# Altium PCB Wiring of the printed circuit board.pcbdoc
Units mm, origin at the board's own origin, x right, y up, seen from the top; angles counter-clockwise.
Board outline 278.37 x 179.81 mm, 2 copper layers (Top Layer, Bottom Layer); 108 components, 101 nets, 596 pads, 86 vias.
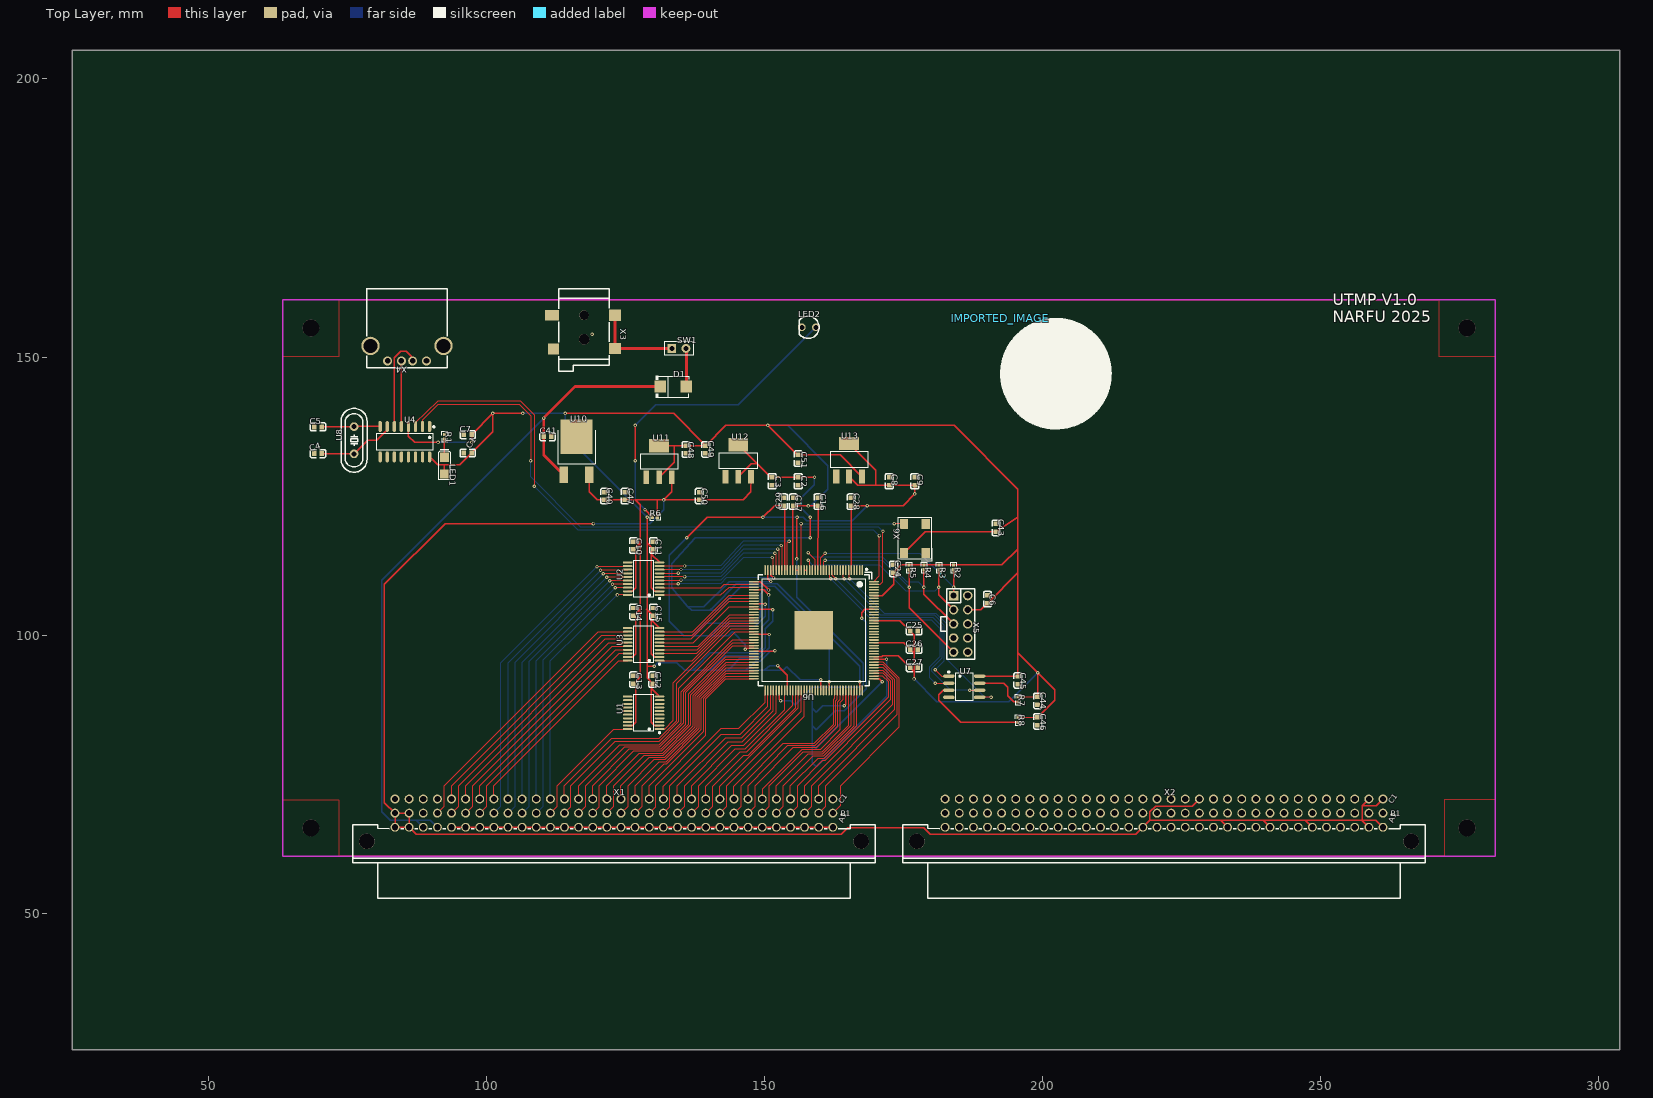
[diagram p0: Top Layer view]
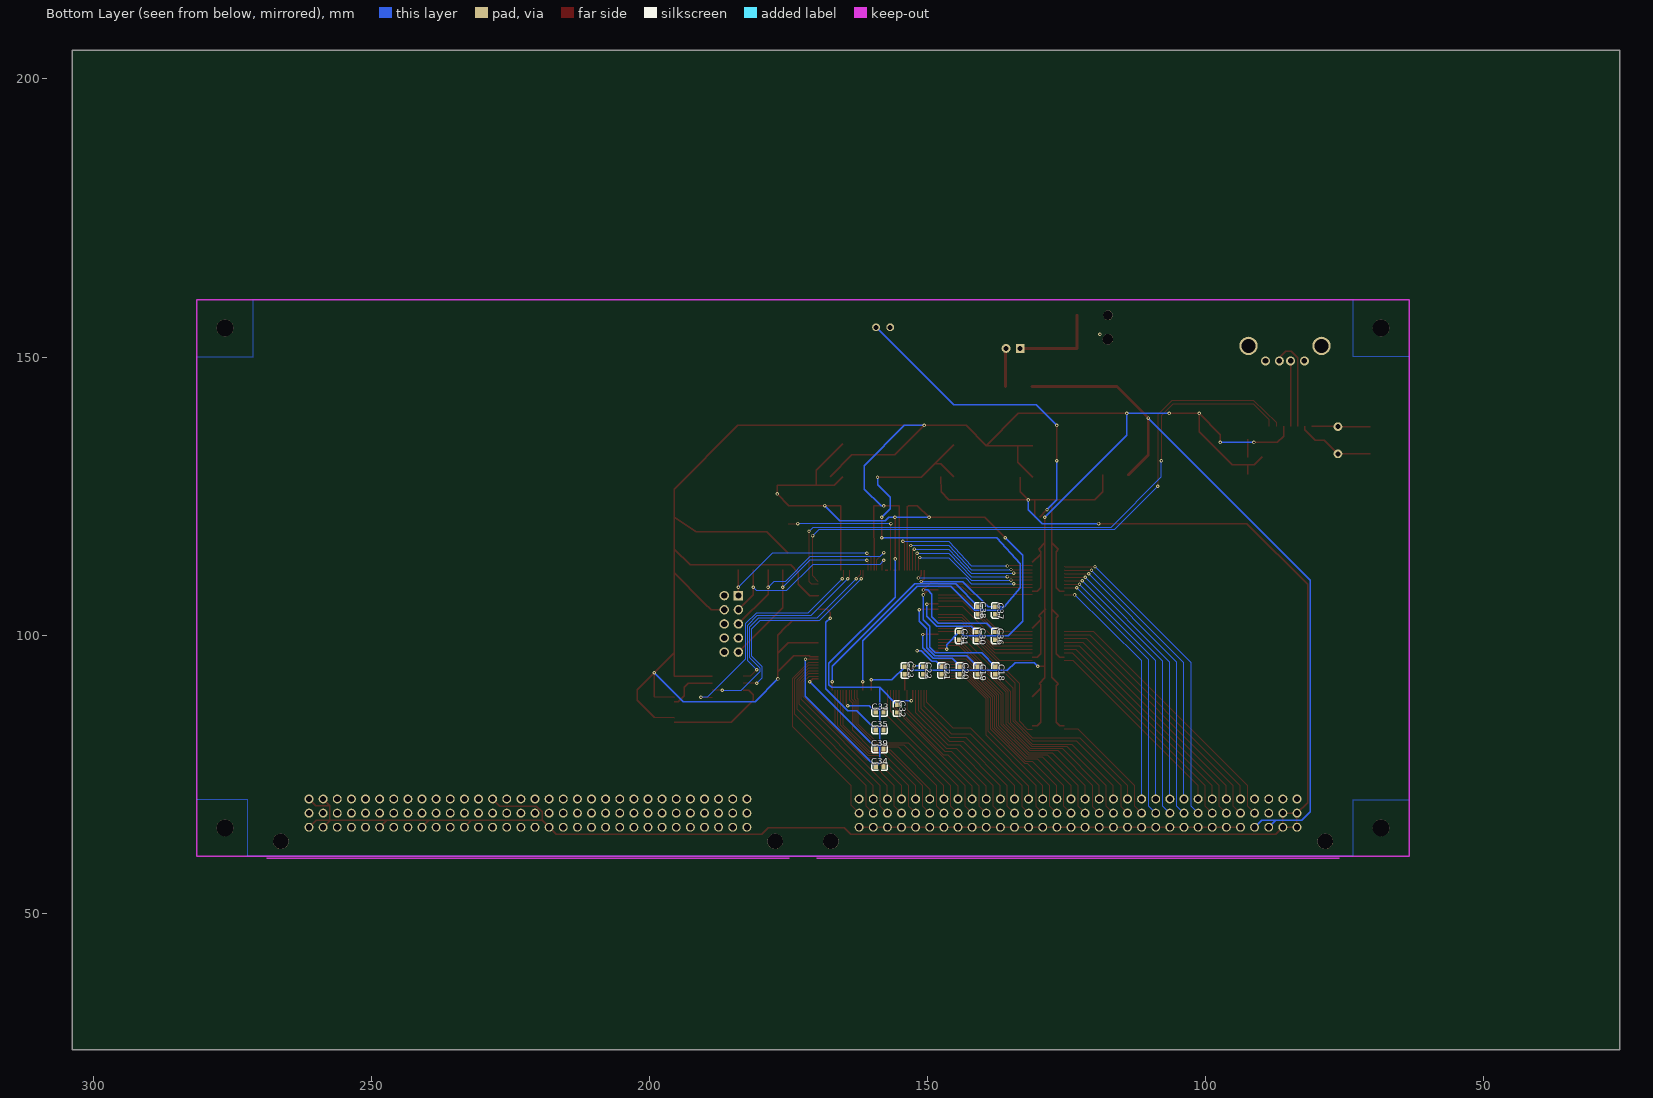
[diagram p1: Bottom Layer view, seen from below]

## Layer stack, top to bottom
Top Layer: signal copper (thickness not stored)
Dielectric: dielectric 0.32, FR-4, Dk 4.8
Bottom Layer: signal copper (thickness not stored)

## Board outline
303.775,25.4 25.4,25.4 25.4,205.207 303.775,205.207

## Components (designator, comment, footprint, x,y, rotation, side; value= is the part's Value field where it differs from the comment)
C1 "100nF" C0603#1 96.563,132.743 r0 top
C2 "10uF" C0603#1 155.999,127.663 r90 top
C3 "100nF" C0603#1 151.3,127.663 r90 top
C4 "24pF" C0603#1 69.639,132.616 r0 top
C5 "24pF" C0603#1 69.639,137.442 r0 top
C6 "100nF" C0603#1 190.035,106.454 r270 top
C7 "100nF" C0603#1 96.563,136.045 r180 top
C8 "100nF" C0603#1 172.382,127.663 r270 top
C9 "10uF" C0603#1 176.954,127.663 r270 top
C10 "100nF" C0603#1 126.408,116.106 r90 top
C11 "100nF" C0603#1 129.964,116.106 r90 top
C12 "100nF" C0603#1 129.837,91.976 r90 top
C13 "100nF" C0603#1 126.408,91.976 r90 top
C14 "100nF" C0603#1 126.408,104.168 r90 top
C15 "100nF" C0603#1 129.964,104.168 r90 top
C16 "100nF" C0603#1 159.555,123.98 r90 top
C17 "100nF" C0603#1 155.11,123.98 r90 top
C18 "100nF" C0603#2 137.711,93.627 r90 bottom
C19 "100nF" C0603#2 140.886,93.627 r90 bottom
C20 "100nF" C0603#2 144.061,93.627 r90 bottom
C21 "100nF" C0603#2 147.363,93.627 r90 bottom
C22 "100nF" C0603#2 150.665,93.627 r270 bottom
C23 "100nF" C0603#2 153.967,93.627 r270 bottom
C24 "100nF" C0603#1 173.144,111.915 r270 top
C25 "100nF" C0603#1 176.827,100.739 r180 top
C26 "100nF" C0603#1 176.827,97.437 r180 top
C27 "100nF" C0603#1 176.827,94.135 r180 top
C28 "100nF" C0603#1 165.524,123.98 r90 top
C29 "100nF" C0603#1 153.332,123.98 r90 top
C30 "100nF" C0603#2 141.013,99.85 r90 bottom
C31 "100nF" C0603#2 144.188,99.85 r90 bottom
C32 "100nF" C0603#2 155.364,86.769 r90 bottom
C33 "100nF" C0603#2 158.539,86.134 r0 bottom
C34 "100nF" C0603#2 158.539,76.355 r0 bottom
C35 "100nF" C0603#2 158.539,82.959 r0 bottom
C36 "100nF" C0603#2 137.711,99.85 r270 bottom
C37 "100nF" C0603#2 137.711,104.422 r90 bottom
C38 "100nF" C0603#2 140.759,104.422 r270 bottom
C39 "100nF" C0603#2 158.539,79.53 r0 bottom
C40 "100nF" C0603#1 121.201,124.996 r270 top
C41 "100nF" C0603#1 110.914,135.664 r180 top
C43 "100nF" C0603#1 191.559,119.281 r270 top
C44 "100nF" C0603#1 199.052,88.166 r270 top
C45 "100nF" C0603#1 195.496,91.849 r270 top
C46 "100nF" C0603#1 199.052,84.483 r270 top
C47 "100nF" C0603#1 124.884,124.996 r270 top
C48 "100nF" C0603#1 135.806,133.378 r90 top
C49 "10uF" C0603#1 139.362,133.378 r90 top
C50 "100nF" C0603#1 138.219,124.996 r270 top
C51 "100nF" C0603#1 155.999,131.727 r90 top
D1 "P6SMB12A" SMB_L4.6-W3.6-LS5.3-RD 133.52,144.681 r0 top
IMPORTED_IMAGE "IMPORTED_IMAGE" IMPORTED_IMAGE 192.347,157.005 r0 top
LED1 "C150KRKT" LED1206-RD 92.372,130.457 r270 top
LED2 "LED-TH-3mm_R" LED-TH_BD3.0_RED 157.904,155.349 r270 top
R1 "1.5КОм" R0402 92.372,135.664 r270 top
R2 "4.7КОм" R0402 183.939,112.169 r270 top
R3 "4.7КОм" R0402 181.272,112.169 r270 top
R4 "4.7КОм" R0402 178.605,112.169 r270 top
R5 "4.7КОм" R0402 175.938,112.169 r270 top
R6 "1.5КОм" R0402 130.218,121.186 r180 top
R7 "4.7КОм" R0402 195.496,88.42 r270 top
R8 "4.7КОм" R0402 195.496,84.737 r270 top
SW1 "Разрыв для кнопки" HDR-F-2.54_1X2 134.536,151.539 r0 top
U1 "YF08E" TSSOP-20_L6.5-W4.4-P0.65-LS6.4-BL 128.186,86.007 r90 top
U2 "YF08E" TSSOP-20_L6.5-W4.4-P0.65-LS6.4-BL 128.186,110.137 r90 top
U3 "YF08E" TSSOP-20_L6.5-W4.4-P0.65-LS6.4-BL 128.186,98.326 r90 top
U4 "CH340G" SOIC-16_L9.9-W3.9-P1.27-LS6.0-BL 85.26,134.775 r180 top
U6 "EP4CE6E22C8N" PQFP-144_L20.0-W20.0-P0.50-LS22.0-BL-EP 158.793,100.866 r180 top
U7 "M25P16-VMN6TP" SOIC-8_L4.9-W3.9-P1.27-LS6.0-BL 185.844,90.706 r270 top
U8 "12MHz" HC-49S_L11.5-W4.7-P4.88 76.116,135.029 r90 top
U10 "78M05D" TO-252-2_L6.6-W6.1-P4.57-LS9.9-BR-CW 116.121,132.235 r270 top
U11 "SPX1117M3" SOT-223-4_L6.5-W3.5-P2.30-LS7.0-BR 130.98,131.219 r270 top
U12 "SPX1117M3" SOT-223_L6.5-W3.5-P2.30-LS7.0-BR 145.204,131.346 r270 top
U13 "SPX1117M3" SOT-223-3_L6.5-W3.4-P2.30-LS7.0-BR 165.143,131.473 r270 top
X1 "DIN 41612" CONN-TH_WINGTAT_9001-14961C00A 122.852,67.973 r0 top
X2 "DIN 41612" CONN-TH_WINGTAT_9001-14961C00A 221.785,67.973 r0 top
X3 "DC" DC-IN_DC050-T 117.391,154.46 r270 top
X4 "USB-231-ARY" USB-A-TH_USB-231-ARY 85.641,150.65 r180 top
X5 "JTAG PLS14" HDR-TH_10P-P2.54-V-M-R2-C5-S2.54 185.209,102.009 r270 top
X6 "50MHz" OSC-SMD_4P-L7.0-W5.0-BL 176.954,117.376 r90 top
? "" ? 73.386,57.587 r0 top
? "" ? 172.319,56.505 r0 top
? "" ? 271.252,56.091 r0 top
? "" ? 65.829,54.539 r0 top
? "" ? 278.808,51.728 r0 top
? "" ? 62.094,62.765 r0 top
? "" ? 172.255,175.288 r0 top
? "" ? 50.72,110.264 r0 top
? "" ? 59.808,157.762 r0 top
? "" ? 65.829,162.783 r0 top
? "" ? 278.808,162.149 r0 top
? "" ? 283.464,157.761 r0 top
? "" ? 73.386,169.114 r0 top
? "" ? 102.913,169.047 r0 top
? "" ? 127.107,166.149 r0 top
? "" ? 138.664,169.09 r0 top
? "" ? 150.221,171.372 r0 top
? "" ? 157.777,163.705 r0 top
? "" ? 166.246,157.761 r0 top
? "" ? 283.646,62.765 r0 top
? "" ? 70.909,160.892 r0 top
? "" ? 62.782,152.682 r0 top
? "" ? 70.909,73.06 r0 top
? "" ? 58.783,67.718 r0 top
? "" ? 282.209,67.846 r0 top
? "" ? 274.236,71.428 r0 top
? "" ? 268.762,152.681 r0 top
? "" ? 273.728,160.93 r0 top

## Footprints (in the part's own frame and the unit in brackets; to place one, negate y for a bottom-side part, rotate by r counter-clockwise, add the part's x,y. Pads: shape width x height; smd on the part's side, far side on the other; paste and mask are expansions set on the pad)
C0603#1 [mm]
  rect 0.8x0.9 smd paste+0 mask+0.051: 1(-0.7,0) 2(0.7,0)
  silkscreen extent -1.39,-0.71 1.39,0.71
C0603#2 [mm]
  rect 0.8x0.9 smd paste+0 mask+0.051: 1(0.7,0) 2(-0.7,0)
  silkscreen extent -1.39,-0.71 1.39,0.71
CONN-TH_WINGTAT_9001-14961C00A [mm]
  round 1.6 hole 1.1 paste+0 mask+0.05: A1(39.37,-2.54) A2(36.83,-2.54) A3(34.29,-2.54) A4(31.75,-2.54) A5(29.21,-2.54) A6(26.67,-2.54) A7(24.13,-2.54) A8(21.59,-2.54) A9(19.05,-2.54) A10(16.51,-2.54) A11(13.97,-2.54) A12(11.43,-2.54) A13(8.89,-2.54) A14(6.35,-2.54) A15(3.81,-2.54) A16(1.27,-2.54) A17(-1.27,-2.54) A18(-3.81,-2.54) A19(-6.35,-2.54) A20(-8.89,-2.54) A21(-11.43,-2.54) A22(-13.97,-2.54) A23(-16.51,-2.54) A24(-19.05,-2.54) A25(-21.59,-2.54) A26(-24.13,-2.54) A27(-26.67,-2.54) A28(-29.21,-2.54) A29(-31.75,-2.54) A30(-34.29,-2.54) A31(-36.83,-2.54) A32(-39.37,-2.54) B1(39.37,0) B2(36.83,0) B3(34.29,0) B4(31.75,0) B5(29.21,0) B6(26.67,0) B7(24.13,0) B8(21.59,0) B9(19.05,0) B10(16.51,0) B11(13.97,0) B12(11.43,0) B13(8.89,0) B14(6.35,0) B15(3.81,0) B16(1.27,0) B17(-1.27,0) B18(-3.81,0) B19(-6.35,0) B20(-8.89,0) B21(-11.43,0) B22(-13.97,0) B23(-16.51,0) B24(-19.05,0) B25(-21.59,0) B26(-24.13,0) B27(-26.67,0) B28(-29.21,0) B29(-31.75,0) B30(-34.29,0) B31(-36.83,0) B32(-39.37,0) C1(39.37,2.54) C2(36.83,2.54) C3(34.29,2.54) C4(31.75,2.54) C5(29.21,2.54) C6(26.67,2.54) C7(24.13,2.54) C8(21.59,2.54) C9(19.05,2.54) C10(16.51,2.54) C11(13.97,2.54) C12(11.43,2.54) C13(8.89,2.54) C14(6.35,2.54) C15(3.81,2.54) C16(1.27,2.54) C17(-1.27,2.54) C18(-3.81,2.54) C19(-6.35,2.54) C20(-8.89,2.54) C21(-11.43,2.54) C22(-13.97,2.54) C23(-16.51,2.54) C24(-19.05,2.54) C25(-21.59,2.54) C26(-24.13,2.54) C27(-26.67,2.54) C28(-29.21,2.54) C29(-31.75,2.54) C30(-34.29,2.54) C31(-36.83,2.54) C32(-39.37,2.54)
  round 2.8 hole 2.8 unplated paste+0: ""(-44.45,-5.08) ""(44.45,-5.08)
  Keep-Out Layer lines w0.254: -47,-8.08 47,-8.08
  silkscreen extent -47,-15.28 47,-2.08
DC-IN_DC050-T [mm]
  rect 2x2.1 smd paste+0 mask+0.05: 1(-3.05,5.65) 1(2.95,5.65)
  rect 1.9x2.5 smd paste+0 mask+0.05: 2(-3.05,-5.65)
  rect 2x2 smd paste+0 mask+0.05: 3(3.05,-5.4)
  round 1.7 hole 1.7 unplated paste+0: ""(-3.05,0.1)
  round 1.9 hole 1.9 unplated paste+0: ""(1.25,0.1)
  silkscreen extent -7.85,-4.45 7.05,4.65
HC-49S_L11.5-W4.7-P4.88 [mm]
  round 1.56 hole 0.9 paste+0 mask+0.051: 1(-2.44,0) 2(2.44,0)
  silkscreen extent -5.75,-2.33 5.75,2.33
HDR-F-2.54_1X2 [mil]
  rect 62x62 hole 35 paste+0 mask+2: 1(-50,0)
  round 62 hole 35 paste+0 mask+2: 2(50,0)
  silkscreen extent -100,-49 100,50
HDR-TH_10P-P2.54-V-M-R2-C5-S2.54 [mm]
  rect 1.7x1.7 hole 1.1 paste+0 mask+0.051: 1(-5.08,-1.27)
  round 1.7 hole 1.1 paste+0 mask+0.051: 2(-5.08,1.27) 3(-2.54,-1.27) 4(-2.54,1.27) 5(0,-1.27) 6(0,1.27) 7(2.54,-1.27) 8(2.54,1.27) 9(5.08,-1.27) 10(5.08,1.27)
  silkscreen extent -6.35,-2.54 6.35,2.54
IMPORTED_IMAGE [mm]
  silkscreen extent 0,-20 20,0
LED1206-RD [mm]
  rect 1.635x1.6 smd paste-100 mask+0.051: 1(-1.517,0) 2(1.517,0)
  silkscreen extent -2.99,-1.04 2.57,1.07
LED-TH_BD3.0_RED [mm]
  round 1.4 hole 0.9 paste+0 mask+0.051: 1(0,1.27) 2(0,-1.27)
  silkscreen extent -2,-1.69 2,1.87
OSC-SMD_4P-L7.0-W5.0-BL [mm]
  rect 1.8x1.5 smd paste+0 mask+0.051: 1(-2.64,-1.95) 2(2.64,-1.95) 3(2.64,1.95) 4(-2.64,1.95)
  silkscreen extent -4,-3.16 3.77,2.93
PQFP-144_L20.0-W20.0-P0.50-LS22.0-BL-EP [mm]
  oval 0.28x1.8 smd paste+0 mask+0.051: 1(-8.75,-10.795) 2(-8.25,-10.795) 3(-7.75,-10.795) 4(-7.25,-10.795) 5(-6.75,-10.795) 6(-6.25,-10.795) 7(-5.75,-10.795) 8(-5.25,-10.795) 9(-4.75,-10.795) 10(-4.25,-10.795) 11(-3.75,-10.795) 12(-3.25,-10.795) 13(-2.75,-10.795) 14(-2.25,-10.795) 15(-1.75,-10.795) 16(-1.25,-10.795) 17(-0.75,-10.795) 18(-0.25,-10.795) 19(0.25,-10.795) 20(0.75,-10.795) 21(1.25,-10.795) 22(1.75,-10.795) 23(2.25,-10.795) 24(2.75,-10.795) 25(3.25,-10.795) 26(3.75,-10.795) 27(4.25,-10.795) 28(4.75,-10.795) 29(5.25,-10.795) 30(5.75,-10.795) 31(6.25,-10.795) 32(6.75,-10.795) 33(7.25,-10.795) 34(7.75,-10.795) 35(8.25,-10.795) 36(8.75,-10.795) 73(8.75,10.795) 74(8.25,10.795) 75(7.75,10.795) 76(7.25,10.795) 77(6.75,10.795) 78(6.25,10.795) 79(5.75,10.795) 80(5.25,10.795) 81(4.75,10.795) 82(4.25,10.795) 83(3.75,10.795) 84(3.25,10.795) 85(2.75,10.795) 86(2.25,10.795) 87(1.75,10.795) 88(1.25,10.795) 89(0.75,10.795) 90(0.25,10.795) 91(-0.25,10.795) 92(-0.75,10.795) 93(-1.25,10.795) 94(-1.75,10.795) 95(-2.25,10.795) 96(-2.75,10.795) 97(-3.25,10.795) 98(-3.75,10.795) 99(-4.25,10.795) 100(-4.75,10.795) 101(-5.25,10.795) 102(-5.75,10.795) 103(-6.25,10.795) 104(-6.75,10.795) 105(-7.25,10.795) 106(-7.75,10.795) 107(-8.25,10.795) 108(-8.75,10.795)
  oval 1.8x0.28 smd paste+0 mask+0.051: 37(10.795,-8.75) 38(10.795,-8.25) 39(10.795,-7.75) 40(10.795,-7.25) 41(10.795,-6.75) 42(10.795,-6.25) 43(10.795,-5.75) 44(10.795,-5.25) 45(10.795,-4.75) 46(10.795,-4.25) 47(10.795,-3.75) 48(10.795,-3.25) 49(10.795,-2.75) 50(10.795,-2.25) 51(10.795,-1.75) 52(10.795,-1.25) 53(10.795,-0.75) 54(10.795,-0.25) 55(10.795,0.25) 56(10.795,0.75) 57(10.795,1.25) 58(10.795,1.75) 59(10.795,2.25) 60(10.795,2.75) 61(10.795,3.25) 62(10.795,3.75) 63(10.795,4.25) 64(10.795,4.75) 65(10.795,5.25) 66(10.795,5.75) 67(10.795,6.25) 68(10.795,6.75) 69(10.795,7.25) 70(10.795,7.75) 71(10.795,8.25) 72(10.795,8.75) 109(-10.795,8.75) 110(-10.795,8.25) 111(-10.795,7.75) 112(-10.795,7.25) 113(-10.795,6.75) 114(-10.795,6.25) 115(-10.795,5.75) 116(-10.795,5.25) 117(-10.795,4.75) 118(-10.795,4.25) 119(-10.795,3.75) 120(-10.795,3.25) 121(-10.795,2.75) 122(-10.795,2.25) 123(-10.795,1.75) 124(-10.795,1.25) 125(-10.795,0.75) 126(-10.795,0.25) 127(-10.795,-0.25) 128(-10.795,-0.75) 129(-10.795,-1.25) 130(-10.795,-1.75) 131(-10.795,-2.25) 132(-10.795,-2.75) 133(-10.795,-3.25) 134(-10.795,-3.75) 135(-10.795,-4.25) 136(-10.795,-4.75) 137(-10.795,-5.25) 138(-10.795,-5.75) 139(-10.795,-6.25) 140(-10.795,-6.75) 141(-10.795,-7.25) 142(-10.795,-7.75) 143(-10.795,-8.25) 144(-10.795,-8.75)
  rect 7x7 smd paste+0 mask+0.051: 145(0,0)
  silkscreen extent -10.4,-11.1 10,10
R0402 [mm]
  rect 0.566x0.54 smd paste-100 mask+0.051: 1(-0.433,0) 2(0.433,0)
  silkscreen extent -0.94,-0.5 0.94,0.5
SMB_L4.6-W3.6-LS5.3-RD [mm]
  rect 2.047x2.192 smd paste+0 mask+0.051: 1(-2.361,0) 2(2.361,0)
  silkscreen extent -3.12,-1.96 2.74,1.96
SOIC-8_L4.9-W3.9-P1.27-LS6.0-BL [mm]
  oval 0.588x2.045 smd paste+0 mask+0.051: 1(-1.905,-2.773) 2(-0.635,-2.773) 3(0.635,-2.773) 4(1.905,-2.773) 5(1.905,2.773) 6(0.635,2.773) 7(-0.635,2.773) 8(-1.905,2.773)
  silkscreen extent -2.8,-2.92 2.53,1.52
SOIC-16_L9.9-W3.9-P1.27-LS6.0-BL [mm]
  oval 0.602x1.971 smd paste+0 mask+0.051: 1(-4.445,-2.736) 2(-3.175,-2.736) 3(-1.905,-2.736) 4(-0.635,-2.736) 5(0.635,-2.736) 6(1.905,-2.736) 7(3.175,-2.736) 8(4.445,-2.736) 9(4.445,2.736) 10(3.175,2.736) 11(1.905,2.736) 12(0.635,2.736) 13(-0.635,2.736) 14(-1.905,2.736) 15(-3.175,2.736) 16(-4.445,2.736)
  silkscreen extent -5.36,-2.82 5.03,1.52
SOT-223-3_L6.5-W3.4-P2.30-LS7.0-BR [mm]
  rect 2.5x1.1 smd paste+0 mask+0.051: 1(2.97,-2.3) 2(2.97,0) 3(2.97,2.3)
  rect 2.34x3.6 smd paste+0 mask+0.051: 4(-2.97,0)
  silkscreen extent -1.57,-3.33 1.37,3.33
SOT-223-4_L6.5-W3.5-P2.30-LS7.0-BR [mm]
  rect 2.47x0.98 smd paste+0 mask+0.051: 1(2.835,-2.3) 2(2.835,0) 3(2.835,2.3)
  rect 2.47x3.6 smd paste+0 mask+0.051: 4(-2.835,0)
  silkscreen extent -1.37,-3.33 1.37,3.33
SOT-223_L6.5-W3.5-P2.30-LS7.0-BR [mm]
  rect 2.465x1.05 smd paste+0 mask+0.051: 1(2.858,-2.3) 2(2.857,0) 3(2.857,2.3)
  rect 2.465x3.54 smd paste+0 mask+0.051: 4(-2.857,0)
  silkscreen extent -1.4,-3.4 1.4,3.4
TO-252-2_L6.6-W6.1-P4.57-LS9.9-BR-CW [mm]
  rect 3x1.6 smd paste+0 mask+0.051: 1(3.424,-2.29) 3(3.424,2.29)
  rect 6.2x5.8 smd paste+0 mask+0.051: 2(-3.424,0)
  silkscreen extent -4.58,-3.35 1.38,3.35
TSSOP-20_L6.5-W4.4-P0.65-LS6.4-BL [mm]
  oval 0.364x1.742 smd paste+0 mask+0.051: 1(-2.925,-2.871) 2(-2.275,-2.871) 3(-1.625,-2.871) 4(-0.975,-2.871) 5(-0.325,-2.871) 6(0.325,-2.871) 7(0.975,-2.871) 8(1.625,-2.871) 9(2.275,-2.871) 10(2.925,-2.871) 11(2.925,2.871) 12(2.275,2.871) 13(1.625,2.871) 14(0.975,2.871) 15(0.325,2.871) 16(-0.325,2.871) 17(-0.975,2.871) 18(-1.625,2.871) 19(-2.275,2.871) 20(-2.925,2.871)
  silkscreen extent -3.71,-3.02 3.33,1.77
USB-A-TH_USB-231-ARY [mm]
  round 1.6 hole 1 paste+0 mask+0.051: 1(-3.5,1.355) 2(-1,1.355) 3(1,1.355) 4(3.5,1.355)
  round 3.3 hole 2.5 paste+0 mask+0.051: 5(-6.57,-1.355) 6(6.57,-1.355)
  silkscreen extent -7.23,-11.68 7.24,2.54
? [mm]

## Free pads (board coordinates)
  round 3 hole 3 unplated paste+0: ""(68.369,65.306) ""(68.369,155.222) ""(276.268,65.306) ""(276.268,155.222)

## Via types
v1: diameter 0.62, hole 0.31, Top Layer to Bottom Layer, tented both sides, 86 vias

## Nets (pads, with @x,y where several pads share a name; then routed paths per layer and width w, separated by ;. In a path a pad name is that pad's centre, name@x,y a point inside that pad or via, vN(x,y) a via of type N, cw(c..) or ccw(c..) an arc to the next point about the centre after c; other vN are vias at no path point)
#CENBL: U6.84 X1.B10 | length 29.2
  Top Layer w0.15: X1.B10 140.632,69.243 140.632,72.799 146.22,78.387 146.982,78.387 155.543,86.948 U6.84
#MSEL: U6.76 X1.B12 | length 30.7
  Top Layer w0.15: X1.B12 135.552,69.243 135.552,72.926 143.426,80.8 145.966,80.8 151.543,86.376 U6.76
#RDEN: U6.77 X1.C11 | length 27.1
  Top Layer w0.15: X1.C11 136.822,72.926 144.061,80.165 146.22,80.165 152.043,85.988 U6.77
#REFRESH: U6.85 X1.C9 | length 25.4
  Top Layer w0.15: X1.C9 141.902,72.799 156.043,86.94 U6.85
#ROWA: U6.99 X1.C7 | length 29.1
  Top Layer w0.15: X1.C7 146.982,72.926 154.094,80.165 159.047,80.165 162.73,83.848 162.73,88.166 163.043,88.478 U6.99
#ROWB: U6.98 X1.B8 | length 32.9
  Top Layer w0.15: X1.B8 145.712,69.243 145.712,72.926 153.332,80.546 158.92,80.546 162.349,83.975 162.349,88.166 162.349,88.42 162.542,88.608 U6.98
#ROWC: U6.87 X1.C8 | length 24.8
  Top Layer w0.15: X1.C8 144.442,72.799 157.043,85.399 U6.87
#ROWD: U6.86 X1.B9 | length 28.2
  Top Layer w0.15: X1.B9 143.172,69.243 143.172,72.926 156.543,86.297 U6.86
#STROBE: U6.80 X1.B11 | length 30.1
  Top Layer w0.15: X1.B11 138.092,69.243 138.092,72.926 144.696,79.53 146.474,79.53 153.543,86.599 U6.80
#WRITE: U6.83 X1.C10 | length 26.7
  Top Layer w0.15: X1.C10 139.362,72.799 145.585,79.022 146.728,79.022 155.043,87.337 U6.83
+1.2V: C8.2 C9.2 C28.1 C29.1 C30.1 C31.1 C32.1 C33.1 C34.1 C35.1 C36.2 C39.1 U6.5 U6.29 U6.37 U6.45 U6.61 U6.78 U6.102 U6.109 U6.116 U6.134 U13.2 U13.4 | length 325.6
  Top Layer w0.25: v1(135.933,117.503) 139.616,121.186 v1(149.649,121.186) 151.743,123.28 C29.1 153.543,123.069 U6.29 ; v1(146.474,97.437) 146.653,97.616 U6.61 ; U6.45 149.979,105.616 v1(150.03,105.565) ; U6.37 149.154,109.616 v1(150.665,108.105) ; U6.78 152.543,88.446 v1(152.824,88.166) ; v1(155.745,113.693) 155.745,121.139 v1(155.792,121.186) ; v1(164.254,87.277) 164.543,87.566 U6.102 ; U13.2 166.683,126.963 C8.2 ; U13.4 169.969,129.616 169.969,126.963 ; U6.5 165.524,111.679 C28.1 v1(168.412,123.28) 174.857,123.28 v1(176.954,125.377) C9.2 C8.2 ; v1(167.429,103.025) 167.429,104.041 168.004,104.616 U6.134 ; U6.109 170.591,92.116 v1(171.112,91.595) ; U6.116 169.631,95.659 v1(171.874,95.659)
  Bottom Layer w0.25: v1(135.933,117.503) 132.758,114.328 132.758,102.517 135.425,99.85 140.378,99.85 ; 137.018,99.85 C36.2@137.711,100.551 ; C36.2 139.297,102.136 147.998,102.136 149.141,103.279 149.141,107.343 149.903,108.105 v1(150.665,108.105) ; C30.1 141.013,100.485 140.378,99.85 ; C30.1@141.013,100.551 142.09,101.628 148.252,101.628 150.03,103.406 v1(150.03,105.565) ; v1(146.474,97.437) 146.474,98.264 C31.1 144.126,100.55 143.426,99.85 140.378,99.85 ; v1(149.649,121.186) v1(155.792,121.186) 156.888,121.186 157.523,120.551 165.682,120.551 v1(168.412,123.28) ; v1(152.824,88.166) 154.667,88.166 C32.1 155.429,87.469 158.539,90.579 ; v1(155.745,113.693) 155.745,106.835 167.683,94.897 167.683,91.087 167.175,90.579 158.539,90.579 ; 158.539,80.277 158.539,80.23 159.239,79.53 159.239,79.722 v1(171.112,91.595) ; 158.539,83.604 158.594,83.604 C35.1@159.239,82.959 ; 158.539,86.817 C33.1@159.24,86.134 ; C33.1@159.239,86.134 160.382,87.277 v1(164.254,87.277) ; C35.1@159.24,82.959 162.669,86.388 164.254,86.388 168.191,90.325 168.191,102.263 v1(167.429,103.025) ; v1(171.874,95.659) 171.874,88.99 159.239,76.355 158.539,77.055 158.539,90.579
+2.5V: C2.2 C3.2 C37.1 C38.2 U6.35 U6.96 U6.107 U12.2 U12.4 | length 167.7
  Top Layer w0.25: U12.2 147.529,130.813 148.594,130.813 ; U12.4 151.045,128.363 C3.2 C2.2 v1(158.92,128.363) ; U6.35 150.543,110.131 v1(151.046,109.629) ; v1(158.158,117.503) v1(158.158,121.186) ; U6.96 161.543,91.551 v1(161.587,91.595) ; U6.107 v1(167.048,91.595)
  Bottom Layer w0.25: 136.121,105.123 136.822,104.422 141.394,104.422 145.712,108.74 151.808,108.74 161.587,98.961 v1(161.587,91.595) ; 140.031,104.422 140.059,104.422 C38.2 144.885,109.248 152.189,109.248 167.048,94.389 v1(167.048,91.595) ; v1(151.046,109.629) 143.553,109.629 139.046,105.122 C37.1 136.122,105.122 133.266,108.486 133.266,112.804 137.457,117.503 v1(158.158,117.503) ; v1(158.158,121.186) 156.634,122.71 156.634,124.742 158.92,127.028 v1(158.92,128.363)
+3.3V: C1.2 C6.2 C7.1 C11.1 C12.1 C15.1 C16.1 C17.1 C18.1 C19.1 C20.1 C21.1 C22.2 C23.2 C24.2 C25.2 C26.2 C27.2 C43.2 C44.1 C45.1 C46.1 C48.2 C49.2 C51.2 LED1.2 R2.1 R3.1 R4.1 R5.1 R7.1 R8.1 U1.2 U1.10 U2.2 U2.10 U3.2 U3.10 U4.4 U4.16 U6.17 U6.26 U6.40 U6.47 U6.56 U6.62 U6.81 U6.93 U6.117 U6.122 U6.130 U6.139 U7.8 U11.2 U11.4 U13.3 X5.4 X6.4 | length 629.9
  Top Layer w0.25: U4.4 85.895,135.791 87.038,134.648 v1(91.229,134.648) ; U4.16 91.16,130.584 95.104,130.584 97.263,132.743 101.073,136.553 v1(101.073,139.855) ; LED1.2 92.372,130.457 ; v1(97.263,134.641) 97.263,136.045 v1(101.073,139.855) ; v1(106.469,139.855) v1(101.073,139.855) ; v1(114.089,139.855) 133.585,139.855 C49.2 ; 128.694,104.731 C15.1 129.583,103.087 129.583,96.675 130.207,96.05 U3.2 ; 128.821,94.356 128.853,94.389 v1(130.091,94.389) ; 128.821,116.57 C11.1 129.583,115.025 129.583,108.486 130.207,107.861 U2.2 ; v1(128.821,121.186) 128.821,92.292 C12.1 129.583,91.022 129.583,84.356 130.207,83.731 U1.2 ; 129.583,90.373 129.616,90.373 U1.10 ; 129.583,102.668 129.64,102.668 U3.10 ; 129.583,114.516 U2.10@131.056,113.063 ; U11.2 133.711,131.114 133.711,134.068 ; U11.4 C48.2@135.806,134.079 ; C48.2 C49.2 ; U6.62 151.741,97.116 v1(151.808,97.183) ; U6.56 v1(150.792,100.104) ; U6.47 151.36,104.616 v1(151.427,104.549) ; U6.40 149.765,108.115 v1(150.665,107.216) ; v1(152.316,94.516) 154.043,92.789 U6.81 ; U6.26 155.043,123.212 C17.1 157.715,123.28 v1(157.777,123.218) 157.839,123.28 C16.1 U6.17 ; U6.93 v1(160.063,91.976) ; U13.3 163.519,132.427 C51.2 155.807,132.427 v1(150.538,137.696) ; U6.117 171.061,96.116 171.239,96.294 173.968,96.294 C27.2 ; U6.122 174.948,98.616 C26.2 176.741,96.823 176.827,96.823 ; U6.130 174.25,102.616 C25.2 176.127,100.677 176.827,99.977 v1(176.827,92.103) ; U6.139 169.615,107.089 171.112,107.089 173.144,109.121 C24.2 174.531,112.601 R5.1 R4.1 R3.1 R2.1 192.639,112.601 195.496,115.458 ; X6.4 178.849,118.581 C43.2 195.496,121.186 ; C27.2 176.827,93.418 ; X5.4 188.83,104.549 C6.2 195.496,111.215 ; U7.8 188.678,92.549 C45.1 195.496,111.215 ; R8.1 C46.1@199.052,85.184 ; R7.1 199.052,88.867 v1(199.052,93.246) ; 195.496,96.802 v1(199.052,93.246) ; C46.1 202.1,88.231 202.1,88.408 ; 202.1,88.42 202.1,90.198 v1(199.052,93.246) ; C49.2 142.98,137.696 v1(150.538,137.696) ; v1(150.538,137.696) 184.066,137.696 195.496,126.266 195.496,121.186 ; 195.496,111.215 195.496,121.186
  Bottom Layer w0.25: v1(91.229,134.648) v1(97.263,134.641) ; v1(106.469,139.855) v1(114.089,139.855) 114.089,135.918 v1(128.821,121.186) ; v1(130.091,94.389) 130.726,95.024 134.155,95.024 135.552,93.627 146.601,93.627 ; 136.926,93.627 137.011,93.627 C18.1 140.186,96.802 148.506,96.802 149.522,97.818 149.522,101.628 150.665,102.771 v1(150.665,107.216) ; 140.072,93.627 140.186,93.627 C19.1 142.853,96.294 148.633,96.294 150.03,97.691 150.03,101.12 151.427,102.517 v1(151.427,104.549) ; 143.26,93.627 143.361,93.627 C20.1 145.52,95.786 148.887,95.786 150.792,97.691 v1(150.792,100.104) ; v1(150.538,137.696) 154.094,137.696 161.333,130.457 161.333,126.266 158.285,123.218 v1(157.777,123.218) ; v1(151.808,97.183) 151.046,97.183 149.141,95.278 148.314,95.278 C21.1 147.301,94.327 146.601,93.627 ; v1(152.316,94.516) 150.854,94.516 C22.2 150.603,94.327 149.903,93.627 ; v1(160.063,91.976) 156.318,91.976 C23.2 153.967,94.262 153.332,93.627 149.903,93.627 ; v1(176.827,92.103) 180.891,88.039 193.845,88.039 v1(199.052,93.246) ; 146.601,93.627 149.903,93.627
+5V: C10.1 C13.1 C14.1 C40.2 C47.2 C50.2 R6.1 U1.19 U2.19 U3.19 U10.3 U11.3 U12.3 X1.A31 X1.A32 X1.B31 X1.B32 X2.A1 X2.A2 X2.A6 X2.A9 X2.A12 X2.A18 X2.C1 X2.C2 X2.C14 | length 422.3
  Top Layer w0.25: U10.3 118.411,125.762 119.877,124.296 C40.2 ; v1(119.169,120.043) 92.499,120.043 81.577,109.121 81.577,69.878 X1.B32 ; C40.2 C47.2 v1(131.804,124.296) ; U1.19 126.165,83.731 126.789,84.356 126.789,90.895 C13.1 127.551,92.418 127.551,123.418 126.674,124.296 ; U3.19 126.165,96.05 126.789,96.675 126.789,103.087 C14.1 127.551,104.61 ; U2.19 126.165,107.861 126.789,108.486 126.789,115.025 C10.1 127.551,116.558 ; 130.637,124.295 R6.1 ; U11.3 133.28,125.772 v1(131.804,124.296) ; C50.2 146.093,124.361 147.49,125.758 U12.3@147.505,128.488 ; C50.2 v1(131.804,124.296) ; X2.C14 226.865,69.243 220.261,69.243 219.245,68.227 219.245,66.703 ; X2.A12 231.945,66.703 ; 239.585,66.703 X2.A9 ; 247.134,66.703 247.185,66.703 X2.A6 ; 257.247,66.703 257.345,66.703 X2.A2 ; 257.412,66.703 257.412,69.31 ; X2.C2 257.412,69.31 ; X2.A1 259.885,66.703 231.945,66.703 ; X2.C1 259.952,69.31 257.412,69.31 ; X1.B32 X1.B31 X1.A31 ; X1.B32 X1.A32 X1.A31 ; X1.A31 87.292,64.163 163.746,64.163 164.889,65.306 178.605,65.306 179.748,64.163 216.705,64.163 X2.A18 219.245,66.703 ; 219.245,66.703 231.945,66.703
  Bottom Layer w0.25: v1(119.169,120.043) 129.329,120.043 131.804,122.518 v1(131.804,124.296)
+12V: C41.2 D1.1 U10.1 X1.A29 X1.A30 | length 130.9
  Top Layer w0.5: U10.1 110.214,132.428 C41.2 v1(110.214,139.028) 115.867,144.681 D1.1@131.159,144.681
  Bottom Layer w0.25: 87.307,66.703 X1.A30 ; X1.A29 89.832,66.703 82.593,66.703 81.069,68.227 81.069,109.883 v1(110.214,139.028)
ASDO: U6.6 U7.5 | length 41.6
  Top Layer w0.15: U6.6 165.043,110.364 v1(165.27,110.137) ; U7.5 v1(190.67,88.801)
  Bottom Layer w0.15: v1(165.27,110.137) 171.493,103.914 180.764,103.914 182.669,102.009 182.669,95.659 189.527,88.801 v1(190.67,88.801)
DATA0: U6.13 U7.2 | length 38.5
  Top Layer w0.15: U6.13 161.543,110.435 v1(161.841,110.137) ; v1(180.637,91.341) U7.2
  Bottom Layer w0.15: v1(161.841,110.137) 169.334,102.644 180.002,102.644 181.526,101.12 181.526,96.167 179.621,94.262 179.621,92.357 v1(180.637,91.341)
GND: C1.1 C2.1 C3.1 C4.1 C5.1 C6.1 C7.2 C8.1 C9.1 C10.2 C11.2 C12.2 C13.2 C14.2 C15.2 C16.2 C17.2 C18.2 C19.2 C20.2 C21.2 C22.1 C23.1 C24.1 C25.1 C26.1 C27.1 C28.2 C29.2 C30.2 C31.2 C32.2 C33.2 C34.2 C35.2 C36.1 C37.2 C38.1 C39.2 C40.1 C41.1 C43.1 C44.2 C45.2 C46.2 C47.1 C48.1 C49.1 C50.1 C51.1 LED2.2 R1.1 U1.11 U2.11 U3.11 U4.1 U6.4 U6.9 U6.14 U6.19 U6.21 U6.22 U6.24 U6.25 U6.27 U6.36 U6.41 U6.48 U6.57 U6.63 U6.79 U6.82 U6.88 U6.89 U6.90 U6.91 U6.92 U6.94 U6.95 U6.97 U6.108 U6.118 U6.123 U6.131 U6.140 U6.145 U7.4 U10.2 U11.1 U12.1 U13.1 X1.A1 X1.A2 X1.A3 X1.A4 X1.A5 X1.A6 X1.A7 X1.A8 X1.A9 X1.A10 X1.A11 X1.A12 X1.A13 X1.A14 X1.A15 X1.A16 X1.A17 X1.A18 X1.A19 X1.A20 X1.A21 X1.A22 X1.A23 X1.A24 X1.A25 X1.A26 X1.A27 X1.A28 X2.A3 X2.A4 X2.A15 X2.C3 X2.C4 X2.C5 X2.C8 X2.C11 X2.C17 X3.2 X4.4 X5.2 X5.10 X6.2 | length 69.6
  Top Layer w0.25: X1.A28 X1.A27 X1.A26 X1.A25 X1.A24 X1.A23 X1.A22 X1.A21 X1.A20 X1.A19 X1.A18 X1.A17 X1.A16 X1.A15 X1.A14 X1.A13 X1.A12 X1.A11 X1.A10 X1.A9 X1.A8 X1.A7 X1.A6 X1.A5 X1.A4 X1.A3 X1.A2 X1.A1 ; U6.25 U6.24 ; U6.22 U6.21
LED1_1: LED1.1 R1.2 | length 3.3
  Top Layer w0.25: LED1.1 R1.2
MA00: U6.100 X1.B7 | length 31.4
  Top Layer w0.15: X1.B7 148.252,69.243 148.252,72.926 155.11,79.784 159.301,79.784 163.111,83.594 163.111,88.039 163.543,88.471 U6.100
MA01: U6.101 X1.C6 | length 27.5
  Top Layer w0.15: X1.C6 149.522,72.291 156.634,79.403 159.936,79.403 163.492,82.959 163.492,87.785 164.043,88.335 U6.101
MA02: U6.103 X1.B6 | length 30.5
  Top Layer w0.15: X1.B6 150.792,69.243 150.792,72.926 156.888,79.022 160.317,79.022 164.61,83.314 165.043,83.747 U6.103
MA03: U6.104 X1.C5 | length 26.7
  Top Layer w0.15: X1.C5 152.062,72.926 157.777,78.641 160.444,78.641 165.543,83.74 U6.104
MA04: U6.105 X1.B5 | length 29
  Top Layer w0.15: X1.B5 153.332,69.243 153.332,72.926 158.666,78.26 160.571,78.26 166.043,83.731 U6.105
MA05: U6.106 X1.C4 | length 25.2
  Top Layer w0.15: X1.C4 154.602,72.926 159.555,77.879 160.698,77.879 166.543,83.724 U6.106
MA06: U6.110 X1.B4 | length 34.2
  Top Layer w0.15: X1.B4 155.872,69.243 155.872,72.926 160.444,77.498 160.825,77.498 172.255,88.928 172.255,91.595 171.234,92.616 U6.110
MA07: U6.111 X1.C3 | length 31.3
  Top Layer w0.15: X1.C3 157.142,72.926 172.636,88.42 172.636,91.722 171.242,93.116 U6.111
MA08: U6.112 X1.B3 | length 34.6
  Top Layer w0.15: X1.B3 158.412,69.243 158.412,72.926 173.017,87.531 173.017,91.849 171.25,93.616 U6.112
MA09: U6.113 X1.C2 | length 31.8
  Top Layer w0.15: X1.C2 159.682,72.926 173.398,86.642 173.398,91.976 171.258,94.116 U6.113
MA10: U6.114 X1.B2 | length 35.2
  Top Layer w0.15: X1.B2 160.952,69.243 160.952,72.926 173.779,85.753 173.779,92.103 171.266,94.616 U6.114
MA11: U6.115 X1.B1 | length 35
  Top Layer w0.15: X1.B1 163.619,69.37 163.619,72.926 174.16,83.467 174.16,92.23 171.274,95.116 U6.115
NCSO: U6.8 U7.1 | length 34.7
  Top Layer w0.15: U6.8 164.043,110.348 v1(164.254,110.137) ; v1(180.637,93.754) 181.78,92.611 U7.1
  Bottom Layer w0.15: v1(164.254,110.137) 170.858,103.533 180.51,103.533 182.288,101.755 182.288,95.405 v1(180.637,93.754)
R6_2: LED2.1 R6.2 | length 57.6
  Top Layer w0.25: v1(126.662,131.346) v1(126.662,137.696) ; v1(128.44,122.531) R6.2
  Bottom Layer w0.25: v1(126.662,131.346) 126.662,124.309 v1(128.44,122.531) ; v1(126.662,137.696) 130.345,141.379 145.204,141.379 LED2.1
RD00/3.3V: U2.1 U6.39 | length 17.5
  Top Layer w0.15: U2.1 142.029,107.216 143.553,108.613 U6.39
RD00/5V: U2.20 X1.C21 | length 43.6
  Top Layer w0.15: v1(123.487,107.216) U2.20
  Bottom Layer w0.15: X1.C21 111.422,95.405 v1(123.487,107.216)
RD01/3.3V: U2.3 U6.38 | length 17.2
  Top Layer w0.15: U2.3 142.029,108.486 142.664,109.121 U6.38
RD01/5V: U2.18 X1.B22 | length 48.6
  Top Layer w0.15: v1(123.106,108.486) 125.289,108.486 U2.18
  Bottom Layer w0.15: X1.B22 110.152,69.243 110.152,95.532 v1(123.106,108.486)
RD02/3.3V: U2.4 U6.34 | length 22.6
  Top Layer w0.15: U2.4 134.323,109.161 v1(134.409,109.248)
  Top Layer w0.25: U6.34 151.043,110.775 v1(151.554,110.264)
  Bottom Layer w0.15: v1(134.409,109.248) 142.029,109.248 143.045,110.264 v1(151.554,110.264)
RD02/5V: U2.17 X1.C22 | length 47
  Top Layer w0.15: v1(122.598,109.121) 125.274,109.121 U2.17
  Bottom Layer w0.15: X1.C22 108.882,95.405 v1(122.598,109.121)
RD03/3.3V: U2.5 U6.33 | length 24.3
  Top Layer w0.15: U2.5 131.128,109.883 v1(134.917,109.883) ; v1(151.3,113.947) 151.543,113.703 U6.33
  Bottom Layer w0.15: v1(134.917,109.883) 142.029,109.883 146.093,113.947 v1(151.3,113.947)
RD03/5V: U2.16 X1.B23 | length 51.6
  Top Layer w0.15: v1(122.09,109.756) 125.259,109.756 U2.16
  Bottom Layer w0.15: X1.B23 107.612,69.243 107.612,95.278 v1(122.09,109.756)
RD04/3.3V: U2.6 U6.32 | length 25.7
  Top Layer w0.15: U2.6 135.496,110.462 v1(135.552,110.518) ; v1(151.808,114.709) 152.043,114.474 U6.32
  Bottom Layer w0.15: v1(135.552,110.518) 142.029,110.518 146.093,114.709 v1(151.808,114.709)
RD04/5V: U2.15 X1.C23 | length 50
  Top Layer w0.15: v1(121.582,110.391) 125.244,110.391 U2.15
  Bottom Layer w0.15: X1.C23 106.342,95.151 v1(121.582,110.391)
RD05/3.3V: U2.7 U6.31 | length 27
  Top Layer w0.15: U2.7 131.098,111.153 v1(134.409,111.153) ; v1(152.316,115.471) 152.543,115.244 U6.31
  Bottom Layer w0.15: v1(134.409,111.153) 142.029,111.153 146.093,115.471 v1(152.316,115.471)
RD05/5V: U2.14 X1.B24 | length 54.6
  Top Layer w0.15: v1(120.947,111.026) 125.229,111.026 U2.14
  Bottom Layer w0.15: X1.B24 105.072,69.243 105.072,95.151 v1(120.947,111.026)
RD06/3.3V: U2.8 U6.30 | length 28.3
  Top Layer w0.15: U2.8 134.891,111.762 v1(134.917,111.788) ; v1(152.951,116.106) 153.078,115.979 153.078,111.696 U6.30
  Bottom Layer w0.15: v1(134.917,111.788) 142.029,111.788 146.093,116.106 v1(152.951,116.106)
RD06/5V: U2.13 X1.C24 | length 53
  Top Layer w0.15: v1(120.439,111.661) 125.214,111.661 U2.13
  Bottom Layer w0.15: X1.C24 103.802,95.024 v1(120.439,111.661)
RD07/3.3V: U2.9 U6.28 | length 30.6
  Top Layer w0.15: U2.9 131.068,112.423 v1(135.552,112.423) ; U6.28 154.043,116.562 v1(154.348,116.868)
  Bottom Layer w0.15: v1(135.552,112.423) 142.029,112.423 146.093,116.868 v1(154.348,116.868)
RD07/5V: U2.12 X1.B25 | length 57.6
  Top Layer w0.15: v1(119.804,112.296) 125.199,112.296 U2.12
  Bottom Layer w0.15: X1.B25 102.532,69.243 102.532,95.024 v1(119.804,112.296)
RD08/3.3V: U3.1 U6.52 | length 19.7
  Top Layer w0.15: U3.1 136.945,95.4 143.66,102.115 U6.52
RD08/5V: U3.20 X1.C25 | length 35.8
  Top Layer w0.15: X1.C25 101.262,72.926 123.737,95.4 U3.20
RD09/3.3V: U3.3 U6.51 | length 19.4
  Top Layer w0.15: U3.3 137.737,96.7 143.652,102.616 U6.51
RD09/5V: U3.18 X1.B26 | length 40.6
  Top Layer w0.15: X1.B26 99.992,69.243 99.992,72.926 123.767,96.7 U3.18
RD10/3.3V: U3.4 U6.50 | length 19.3
  Top Layer w0.15: U3.4 137.879,97.35 143.644,103.115 U6.50
RD10/5V: U3.17 X1.C26 | length 39.1
  Top Layer w0.15: X1.C26 98.722,72.926 123.147,97.35 U3.17
RD11/3.3V: U3.5 U6.49 | length 19.3
  Top Layer w0.15: U3.5 138.021,98.001 143.636,103.616 U6.49
RD11/5V: U3.16 X1.B27 | length 43.7
  Top Layer w0.15: X1.B27 97.452,69.243 97.452,72.926 122.527,98.001 U3.16
RD12/3.3V: U3.6 U6.46 | length 19.6
  Top Layer w0.15: U3.6 137.147,98.651 143.612,105.115 U6.46
RD12/5V: U3.15 X1.C27 | length 42.2
  Top Layer w0.15: X1.C27 96.182,72.926 121.907,98.651 U3.15
RD13/3.3V: U3.7 U6.44 | length 19.8
  Top Layer w0.15: U3.7 136.781,99.301 143.596,106.115 U6.44
RD13/5V: U3.14 X1.B28 | length 46.8
  Top Layer w0.15: X1.B28 94.912,69.243 94.912,72.926 121.287,99.301 U3.14
RD14/3.3V: U3.8 U6.43 | length 19.7
  Top Layer w0.15: U3.8 136.923,99.951 143.588,106.616 U6.43
RD14/5V: U3.13 X1.C28 | length 45.3
  Top Layer w0.15: X1.C28 93.642,72.926 120.667,99.951 U3.13
RD15/3.3V: U3.9 U6.42 | length 19.6
  Top Layer w0.15: U3.9 137.065,100.601 143.58,107.115 U6.42
RD15/5V: U3.12 X1.B29 | length 49.9
  Top Layer w0.15: X1.B29 92.372,69.243 92.372,72.926 120.047,100.601 U3.12
RD16/3.3V: U1.1 U6.53 | length 28.6
  Top Layer w0.15: U1.1 131.992,83.081 133.393,84.61 133.393,91.214 133.393,91.341 143.668,101.616 U6.53
RD16/5V: U1.20 X1.B21 | length 22.3
  Top Layer w0.15: X1.B21 112.692,69.243 112.692,72.926 122.848,83.081 U1.20
S$32583: 
SW1_2: D1.2 SW1.2 | length 6.9
  Top Layer w0.5: SW1.2 135.881,151.464 D1.2
TCK: R2.2 U6.16 X5.1 | length 33.7
  Top Layer w0.15: U6.16 160.043,113.926 v1(160.825,114.709)
  Top Layer w0.25: X5.1 v1(183.939,108.62) R2.2
  Bottom Layer w0.15: v1(160.825,114.709) 177.851,114.709 v1(183.939,108.62)
TDI: R5.2 U6.15 X5.9 | length 37.1
  Top Layer w0.15: U6.15 160.543,113.156 v1(160.825,113.439)
  Top Layer w0.25: R5.2 v1(175.938,108.595) 175.938,104.93 X5.9
  Bottom Layer w0.15: v1(160.825,113.439) 171.094,113.439 v1(175.938,108.595)
TDO: R3.2 U6.20 X5.3 | length 36.2
  Top Layer w0.15: v1(157.777,113.439) 158.043,113.173 U6.20
  Top Layer w0.25: R3.2 v1(181.272,108.62) 181.272,107.216 X5.3
  Bottom Layer w0.15: v1(157.777,113.439) 158.539,112.677 170.604,112.677 175.303,107.978 180.63,107.978 v1(181.272,108.62)
TMS: R4.2 U6.18 X5.5 | length 39.1
  Top Layer w0.15: v1(157.777,114.836) 159.043,113.57 U6.18
  Top Layer w0.25: R4.2 v1(178.605,108.586) 178.605,107.343 X5.5
  Bottom Layer w0.15: v1(157.777,114.836) 158.539,114.074 171.112,114.074 175.557,109.629 177.564,109.629 v1@178.605,108.587
U4_2: U4.2 U6.143 | length 112
  Top Layer w0.15: U4.2 88.435,138.712 91.229,141.506 105.834,141.506 107.866,139.474 v1(107.866,131.346) ; U6.143 170.726,109.115 171.239,109.629 v1(171.239,118.646)
  Bottom Layer w0.15: v1(107.866,131.346) 107.866,128.425 116.883,119.408 170.477,119.408 v1(171.239,118.646)
U4_3: U4.3 U6.144 | length 111.9
  Top Layer w0.15: U4.3 87.165,138.204 91.229,142.141 105.961,142.141 108.501,139.601 v1(108.501,126.774) ; U6.144 170.604,110.632 v1(170.604,117.884)
  Bottom Layer w0.15: v1(108.501,126.774) 116.375,118.9 169.461,118.9 v1(170.604,117.884)
U4_5: U4.5 X4.3 | length 11.8
  Top Layer w0.25: U4.5 X4.3@84.64,149.296
U4_6: U4.6 X4.2 | length 17.2
  Top Layer w0.25: U4.6 83.355,149.888 84.498,151.031 85.514,151.031 86.641,149.904 X4.2
U4_7: C4.2 U4.7 U8.1 | length 14.1
  Top Layer w0.25: C4.2@70.339,132.616 70.366,132.589 U8.1 78.556,135.029 80.18,135.029 82.085,136.934 U4.7
U4_8: C5.2 U4.8 U8.2 | length 10.5
  Top Layer w0.25: C5.2@70.339,137.442 70.366,137.468 U8.2 76.158,137.51 U4.8
U6_23: U6.23 X6.3 | length 26.9
  Top Layer w0.15: v1(156.507,120.043) 156.507,111.696 U6.23 ; v1(173.271,120.043) 174.977,120.043 X6.3
  Bottom Layer w0.15: v1(156.507,120.043) v1(173.271,120.043)
U7_3: R8.2 U7.3 | length 19
  Top Layer w0.25: U7.3 182.034,90.071 181.272,89.309 181.272,88.293 185.261,84.304 R8.2
U7_6: U6.12 U7.6 | length 43.4
  Top Layer w0.15: U6.12 162.043,110.824 v1(162.73,110.137) ; v1(186.86,90.071) U7.6
  Bottom Layer w0.15: v1(162.73,110.137) 169.715,103.152 180.256,103.152 181.907,101.501 181.907,95.913 180.002,94.008 180.002,93.5 183.431,90.071 v1(186.86,90.071)
U7_7: R7.2 U7.7 | length 9.2
  Top Layer w0.25: U7.7 192.956,91.341 193.718,90.579 193.718,89.055 194.786,87.987 R7.2
WD00: U6.75 X1.C12 | length 28.2
  Top Layer w0.15: X1.C12 134.282,72.926 142.918,81.562 145.839,81.562 151.043,86.766 U6.75
WD01: U6.74 X1.B13 | length 31.9
  Top Layer w0.15: X1.B13 132.885,69.116 132.885,72.926 142.156,82.197 145.585,82.197 150.543,87.155 U6.74
WD02: U6.73 X1.C13 | length 29
  Top Layer w0.15: X1.C13 131.742,72.799 142.156,83.213 145.331,83.213 150.043,87.925 U6.73
WD03: U6.72 X1.B14 | length 34.9
  Top Layer w0.15: X1.B14 130.345,69.116 130.345,72.926 139.362,81.943 139.362,88.547 142.931,92.116 U6.72
WD04: U6.71 X1.C14 | length 32.8
  Top Layer w0.15: X1.C14 129.202,72.926 138.981,82.705 138.981,88.625 142.972,92.616 U6.71
WD05: U6.70 X1.B15 | length 37.2
  Top Layer w0.15: X1.B15 127.932,69.243 127.932,72.926 131.869,76.863 132.377,76.863 138.6,83.086 138.6,88.674 143.042,93.116 U6.70
WD06: U6.69 X1.C15 | length 35.6
  Top Layer w0.15: X1.C15 126.662,72.926 130.98,77.244 132.25,77.244 138.219,83.213 138.219,88.801 143.034,93.616 U6.69
WD07: U6.68 X1.B16 | length 40.1
  Top Layer w0.15: X1.B16 125.392,69.243 125.392,72.926 130.091,77.625 132.123,77.625 137.838,83.34 137.838,88.928 143.026,94.116 U6.68
WD08: U6.67 X1.C16 | length 38.5
  Top Layer w0.15: X1.C16 124.122,72.926 129.202,78.006 131.996,78.006 137.457,83.467 137.457,89.055 143.018,94.616 U6.67
WD09: U6.66 X1.B17 | length 43
  Top Layer w0.15: X1.B17 122.852,69.243 122.852,72.926 128.313,78.387 131.742,78.387 137.076,83.721 137.076,89.182 143.01,95.116 U6.66
WD10: U6.65 X1.C17 | length 41.4
  Top Layer w0.15: X1.C17 121.582,72.926 127.424,78.768 131.615,78.768 136.695,83.848 136.695,89.309 143.002,95.616 U6.65
WD11: U6.64 X1.B18 | length 46
  Top Layer w0.15: X1.B18 120.185,69.116 120.185,72.926 126.408,79.149 131.488,79.149 136.314,83.975 136.314,89.436 142.994,96.116 U6.64
WD12: U6.60 X1.C18 | length 45.1
  Top Layer w0.15: X1.C18 119.042,72.926 125.646,79.53 131.361,79.53 135.806,83.975 135.806,89.69 144.188,98.072 U6.60
WD13: U6.59 X1.B19 | length 49.6
  Top Layer w0.15: X1.B19 117.772,69.243 117.772,72.926 124.757,79.911 131.107,79.911 135.425,84.229 135.425,89.817 144.224,98.616 U6.59
WD14: U6.58 X1.C19 | length 48
  Top Layer w0.15: X1.C19 116.502,72.926 123.868,80.292 130.98,80.292 134.917,84.229 134.917,89.817 144.216,99.115 U6.58
WD15: U6.55 X1.B20 | length 53.3
  Top Layer w0.15: X1.B20 115.105,69.116 115.105,72.926 123.106,80.927 130.98,80.927 134.536,84.483 134.536,90.452 144.7,100.616 U6.55
WD16: U6.54 X1.C20 | length 52.1
  Top Layer w0.15: X1.C20 113.962,72.926 122.471,81.435 130.98,81.435 134.155,84.61 134.155,91.341 143.93,101.115 U6.54
X3_1: SW1.1 X3.1 | length 16.2
  Top Layer w0.5: X3.1@123.041,157.51 123.041,151.51 123.07,151.539 SW1.1
pads on no net: U1.3 U1.4 U1.5 U1.6 U1.7 U1.8 U1.9 U1.12 U1.13 U1.14 U1.15 U1.16 U1.17 U1.18 U4.9 U4.10 U4.11 U4.12 U4.13 U4.14 U4.15 U6.1 U6.2 U6.3 U6.7 U6.10 U6.11 U6.119 U6.120 U6.121 U6.124 U6.125 U6.126 U6.127 U6.128 U6.129 U6.132 U6.133 U6.135 U6.136 U6.137 U6.138 U6.141 U6.142 X1. X1.B30 X1.C1 X1.C29 X1.C30 X1.C31 X1.C32 X2. X2.A5 X2.A7 X2.A8 X2.A10 X2.A11 X2.A13 X2.A14 X2.A16 X2.A17 X2.A19 X2.A20 X2.A21 X2.A22 X2.A23 X2.A24 X2.A25 X2.A26 X2.A27 X2.A28 X2.A29 X2.A30 X2.A31 X2.A32 X2.B1 X2.B2 X2.B3 X2.B4 X2.B5 X2.B6 X2.B7 X2.B8 X2.B9 X2.B10 X2.B11 X2.B12 X2.B13 X2.B14 X2.B15 X2.B16 X2.B17 X2.B18 X2.B19 X2.B20 X2.B21 X2.B22 X2.B23 X2.B24 X2.B25 X2.B26 X2.B27 X2.B28 X2.B29 X2.B30 X2.B31 X2.B32 X2.C6 X2.C7 X2.C9 X2.C10 X2.C12 X2.C13 X2.C15 X2.C16 X2.C18 X2.C19 X2.C20 X2.C21 X2.C22 X2.C23 X2.C24 X2.C25 X2.C26 X2.C27 X2.C28 X2.C29 X2.C30 X2.C31 X2.C32 X3. X3.3 X4.1 X4.5 X4.6 X5.6 X5.7 X5.8 X6.1
copper on no net:
  other v1: 118.915,154.079

## Polygon pours and split planes (outlines as drawn)
GND on Bottom Layer (solid): 272.204,70.386 281.348,70.386 281.348,150.015 271.188,150.015 271.188,160.429 73.449,160.429 73.449,150.142 63.289,150.142 63.289,70.259 73.449,70.259 73.449,60.226 272.204,60.226
GND on Top Layer (solid): 271.188,150.142 281.348,150.142 281.348,70.386 272.204,70.386 272.204,60.226 73.449,60.226 73.449,70.259 63.289,70.259 63.289,150.142 73.449,150.142 73.449,160.302 271.188,160.302

## Silkscreen, mask and mechanical layers (free items; w line width, h text height)
Top Overlay:
  lines w0.25 net S$32583: 182.669,100.729 181.653,100.729 181.653,103.279 182.669,103.279
  text "UTMP V1.0 / NARFU 2025" at 252.138,156.238 h2.03

## Text inside footprints (layer, text, board x,y; h text height)
X1: Top Overlay "A1" at 164.086,66.142 h1 r69; Top Overlay "C1" at 163.902,69.591 h1 r55; Top Overlay "B1" at 163.622,67.432 h1
X2: Top Overlay "A1" at 263.019,66.142 h1 r69; Top Overlay "C1" at 262.835,69.591 h1 r55; Top Overlay "B1" at 262.555,67.432 h1